# Altium PCB PCB1.PcbDoc
Units mm, origin at the board's own origin, x right, y up, seen from the top; angles counter-clockwise.
Board outline 152.4 x 101.6 mm, 2 copper layers (Top Layer, Bottom Layer); 5 components, 13 nets, 60 pads, 0 vias.
Unrouted connection lines stored in the file: 5.
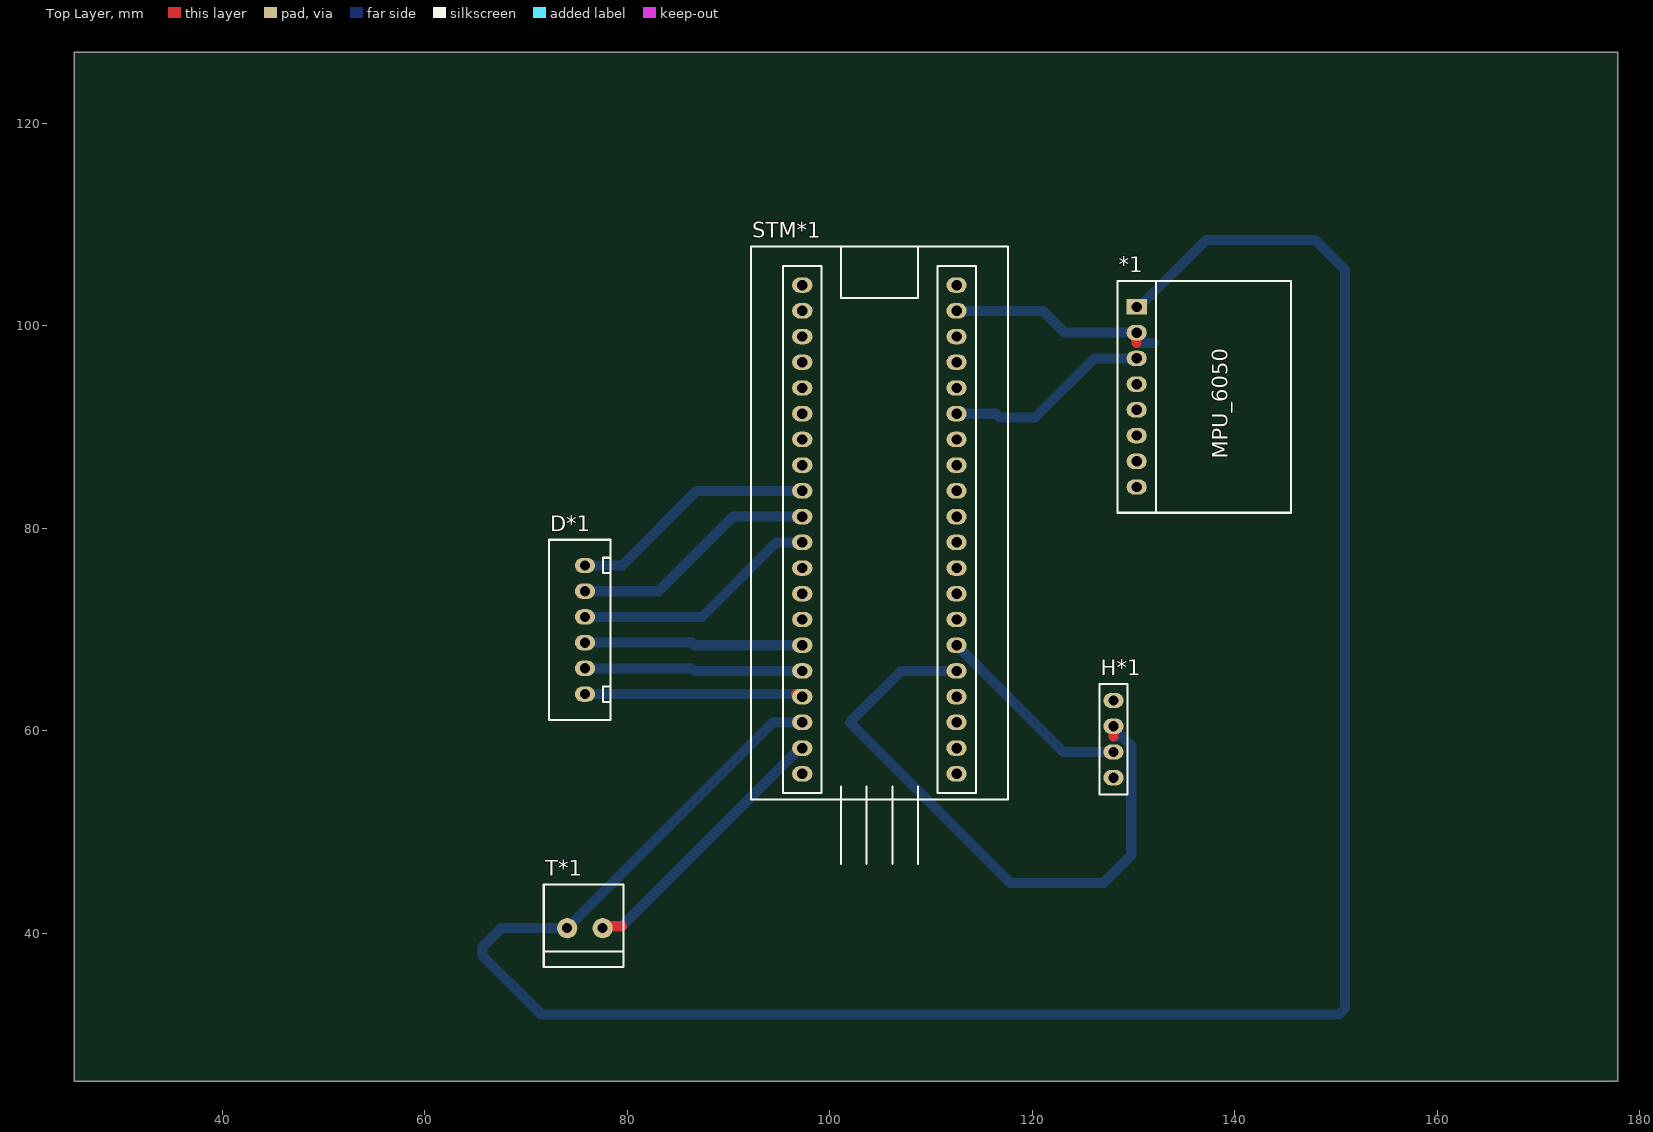
[diagram p0: Top Layer view]
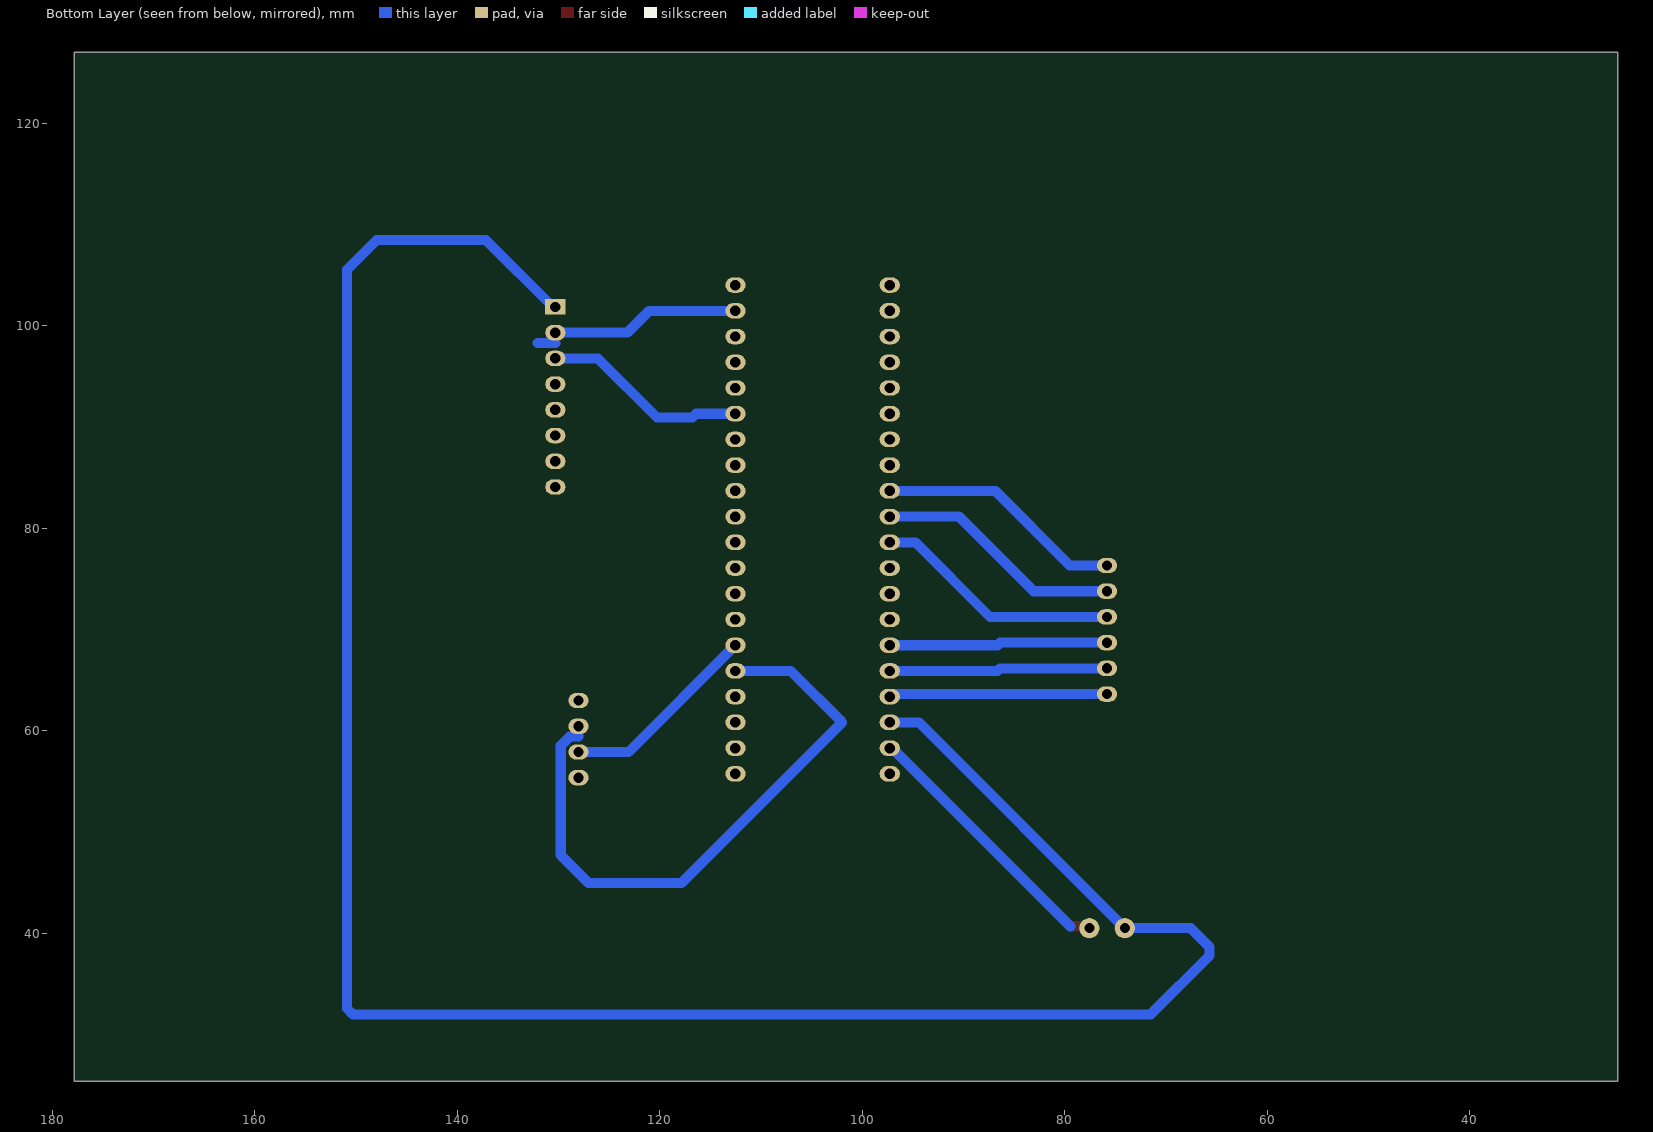
[diagram p1: Bottom Layer view, seen from below]

## Layer stack, top to bottom
Top Solder: solder mask 0.0102, Solder Resist, Dk 3.5
Top Layer: signal copper 0.0356
Dielectric 1: dielectric 0.32, FR-4, Dk 4.8
Bottom Layer: signal copper 0.0356
Bottom Solder: solder mask 0.0102, Solder Resist, Dk 3.5

## Board outline
25.4,25.4 177.8,25.4 177.8,127 25.4,127

## Design rules (kind name [scope] priority, off if disabled: settings)
Clearance [All] p1: gap=0.254 ignorepadtopadclearanceinfootprint=FALSE except(0: Arc-Hole Track-Hole SMDPad-Hole THPad-Hole Via-Hole Fill-Hole Poly-Hole Region-Hole Text-Hole)
PolygonConnect [All] p1: connectstyle=Relief reliefconductorwidth=0.254 reliefentries=4 polygonreliefangle="90 Angle" airgapwidth=0.254
RoutingVias [All] p1: holewidth=0.711 width=1.27 viastyle="Through Hole" minholewidth=0.711 minwidth=1.27 maxholewidth=0.711 maxwidth=1.27
SolderMaskExpansion [All] p1: expansion=0.102 istentingtop=FALSE
Width [All] p1: maxlimit=1 minlimit=0.254 preferedwidth=0.254 minimp=50.000000 maximp=50.000000 favimp=50.000000
30 further rules are at their usual default settings.

## Components (designator, comment, footprint, x,y, rotation, side; value= is the part's Value field where it differs from the comment)
*1 "MPU_6050" MPU6050 130.302,92.964 r90 top
D*1 "LM298N" DATA_PIN_HEADER_6_2.54m 75.819,69.977 r90 top
H*1 "UltraSonic" Female_Header_4 128.016,59.182 r90 top
STM*1 "STM32" STM32 104.902,79.883 r270 top
T*1 "Rosetta" Terminal_block_2pins_3.5mm 75.819,40.513 r0 top

## Footprints (in the part's own frame and the unit in brackets; to place one, negate y for a bottom-side part, rotate by r counter-clockwise, add the part's x,y. Pads: shape width x height; smd on the part's side, far side on the other; paste and mask are expansions set on the pad)
DATA_PIN_HEADER_6_2.54m [mil]
  oval 60x78.74 hole 40: 1(-250,0) 2(-150,0) 3(-50,0) 4(50,0) 5(150,0) 6(250,0)
  silkscreen extent -350,-100 350,140, body extent -343,-94 343,133, height 276
Female_Header_4 [mil]
  oval 60x78.74 hole 40: 1(-150,0) 2(-50,0) 3(50,0) 4(150,0)
  silkscreen extent -215,-55 215,55, body extent -210,-50 210,50, height 336
MPU6050 [mm]
  oval 1.524x2 hole 1.02: ADO(-6.35,0) GND(6.35,0) INT(-8.89,0) SCL(3.81,0) SDA(1.27,0) XCL(-3.81,0) XDA(-1.27,0)
  rect 1.524x2 hole 1.02: VCC(8.89,0)
  silkscreen extent -11.43,-15.24 11.43,1.91, body extent -10.55,-14.6 10.55,1.27, height 14.64
STM32 [mm]
  oval 1.524x2 hole 1.02: 3V3(-19.05,7.62) 3V3(24.13,-7.62) 5V(19.05,-7.62) GND(-24.13,7.62) GND(-21.59,7.62) GND(21.59,-7.62) PA_0(13.97,7.62) PA_1(11.43,7.62) PA_2(8.89,7.62) PA_3(6.35,7.62) PA_4(3.81,7.62) PA_5(1.27,7.62) PA_6(-1.27,7.62) PA_7(-3.81,7.62) PA_8(-13.97,-7.62) PA_9(-11.43,-7.62) PA_10(-8.89,-7.62) PA_11(-6.35,-7.62) PA_12(-3.81,-7.62) PA_15(-1.27,-7.62) PB-4(3.81,-7.62) PB-5(6.35,-7.62) PB_0(-6.35,7.62) PB_1(-8.89,7.62) PB_3(1.27,-7.62) PB_6(8.89,-7.62) PB_7(11.43,-7.62) PB_8(13.97,-7.62) PB_9(16.51,-7.62) PB_10(-11.43,7.62) PB_11(-13.97,7.62) PB_12(-24.13,-7.62) PB_13(-21.59,-7.62) PB_14(-19.05,-7.62) PB_15(-16.51,-7.62) PC_13(21.59,7.62) PC_14(19.05,7.62) PC_15(16.51,7.62) RES(-16.51,7.62) VBT(24.13,7.62)
  silkscreen extent -27.94,-12.7 33.02,12.7, body extent -27.33,-11.43 31.09,11.43, height 21.6
Terminal_block_2pins_3.5mm [mm]
  round 2 hole 1: 1(-1.75,0) 2(1.75,0)
  silkscreen extent -4.06,-3.81 3.81,4.32, body extent -3.93,-3.4 3.52,4, height 8.51

## Part data
D*1: library part DATA_PIN_HEADER_6_2.54m
H*1: library part FEMALE_HEADER_4
T*1: library part Terminal_block_2pins_3.5mm

## Nets (pads, with @x,y where several pads share a name; then routed paths per layer and width w, separated by ;. In a path a pad name is that pad's centre, name@x,y a point inside that pad or via, vN(x,y) a via of type N, cw(c..) or ccw(c..) an arc to the next point about the centre after c; other vN are vias at no path point)
+5: H*1.4
Clock: *1.SCL STM*1.PB_10 | length 20.4
  Bottom Layer w1: STM*1.PB_10 116.395,91.313 116.776,90.932 120.269,90.932 126.111,96.774 *1.SCL
Data: *1.SDA STM*1.PB_11 | length 0.4
  Top Layer w1: STM*1.PB_11@112.422,93.953 STM*1.PB_11 ; *1.SDA@130.064,94.234 *1.SDA
Echo: H*1.3 STM*1.PA_0 | length 62.1
  Top Layer w1: 128.016,59.428 H*1.3
  Bottom Layer w1: STM*1.PA_0 107.061,65.913 101.981,60.833 117.856,44.958 127,44.958 129.77,47.728 129.77,58.54 128.882,59.428 128.016,59.428
ENA: D*1.1 STM*1.PB_9 | length 21.6
  Top Layer w1: STM*1.PB_9@96.648,63.627 96.902,63.373 STM*1.PB_9
  Bottom Layer w1: D*1.1 STM*1.PB_9@96.648,63.627
ENB: D*1.6 STM*1.PA_12 | length 24.5
  Bottom Layer w1: D*1.6 79.502,76.327 86.868,83.693 STM*1.PA_12
Ground: *1.GND H*1.1 STM*1.GND T*1.2 | length 48.5
  Top Layer w1: T*1.2 77.76,40.704 79.455,40.704 ; STM*1.GND@97.044,58.293 STM*1.GND@97.282,58.293 ; 130.302,98.29 *1.GND
  Bottom Layer w1: 79.455,40.704 STM*1.GND@97.044,58.293 ; STM*1.GND@112.522,101.473 121.031,101.473 123.19,99.314 *1.GND ; 130.302,98.29 132.056,98.29
IN1: D*1.2 STM*1.PB_8 | length 21.6
  Bottom Layer w1: D*1.2 86.373,66.167 86.627,65.913 STM*1.PB_8
IN2: D*1.3 STM*1.PB_7 | length 21.6
  Bottom Layer w1: D*1.3 86.373,68.707 86.627,68.453 STM*1.PB_7
NetD*1_4: D*1.4 STM*1.PB_3 | length 24.5
  Bottom Layer w1: D*1.4 87.376,71.247 94.742,78.613 STM*1.PB_3
NetD*1_5: D*1.5 STM*1.PA_15 | length 24.5
  Bottom Layer w1: D*1.5 83.058,73.787 90.424,81.153 STM*1.PA_15
Trig: H*1.2 STM*1.PA_1 | length 19.9
  Bottom Layer w1: STM*1.PA_1 123.063,57.912 H*1.2
Vcc: *1.VCC STM*1.5V T*1.1 | length 227.2
  Top Layer w1: STM*1.5V STM*1.5V@97.52,60.833 ; *1.VCC *1.VCC@130.54,101.854
  Bottom Layer w1: STM*1.5V 94.389,60.833 T*1.1 67.564,40.513 65.692,38.641 65.692,37.813 71.501,32.004 150.29,32.004 150.876,32.59 150.876,105.537 147.939,108.474 137.16,108.474 *1.VCC@130.54,101.854
pads on no net: *1.ADO *1.INT *1.XCL *1.XDA STM*1.3V3 STM*1.PA_2 STM*1.PA_3 STM*1.PA_4 STM*1.PA_5 STM*1.PA_6 STM*1.PA_7 STM*1.PA_8 STM*1.PA_9 STM*1.PA_10 STM*1.PA_11 STM*1.PB-4 STM*1.PB-5 STM*1.PB_0 STM*1.PB_1 STM*1.PB_6 STM*1.PB_12 STM*1.PB_13 STM*1.PB_14 STM*1.PB_15 STM*1.PC_13 STM*1.PC_14 STM*1.PC_15 STM*1.RES STM*1.VBT